# Altium PCB TSAL.PcbDoc
Units mil, origin at the board's own origin, x right, y up, seen from the top; angles counter-clockwise.
Board outline 4803.15 x 2559.06 mil, 2 copper layers (Top Layer, Bottom Layer); 20 components, 14 nets, 60 pads, 4 vias.
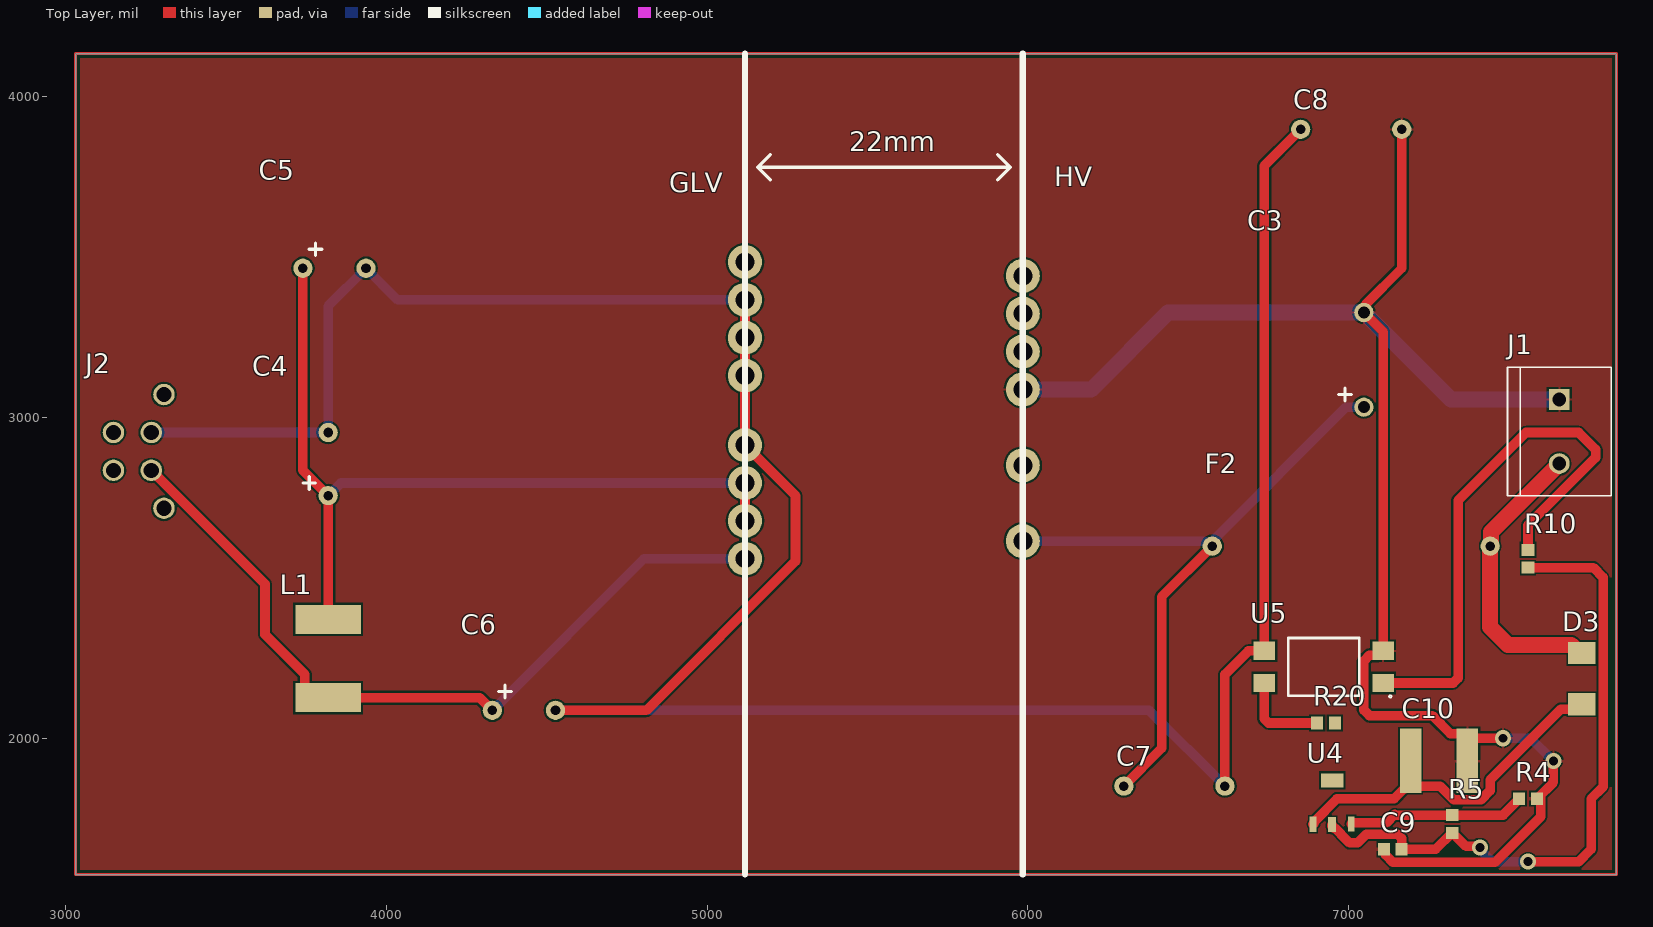
[diagram p0: Top Layer view]
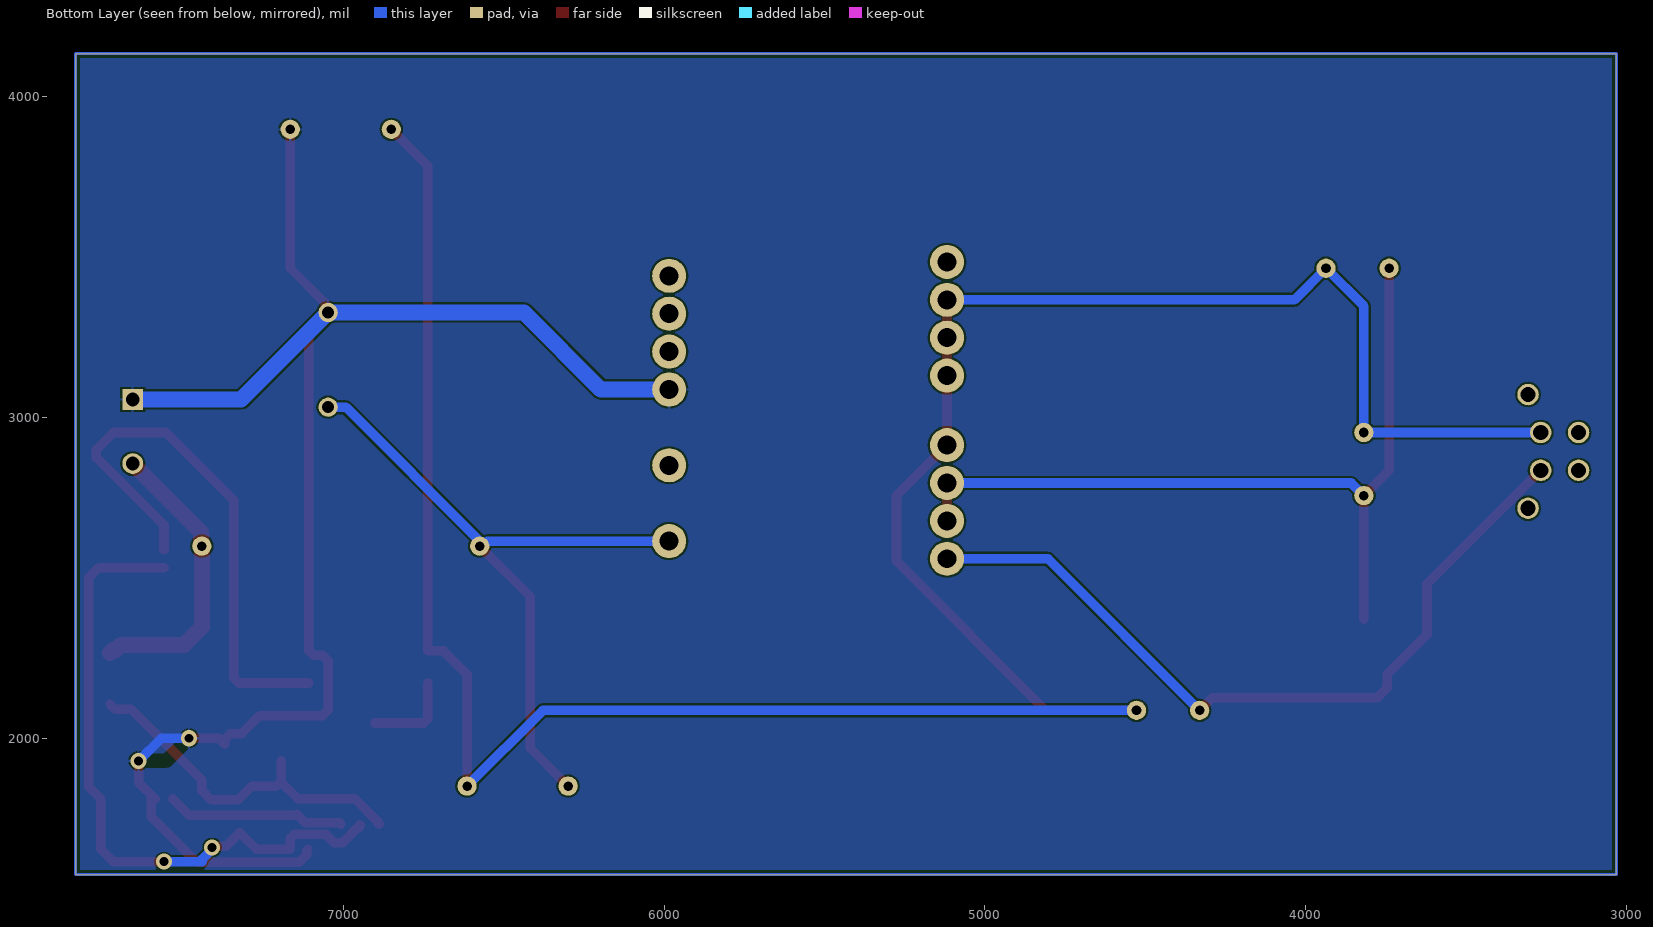
[diagram p1: Bottom Layer view, seen from below]
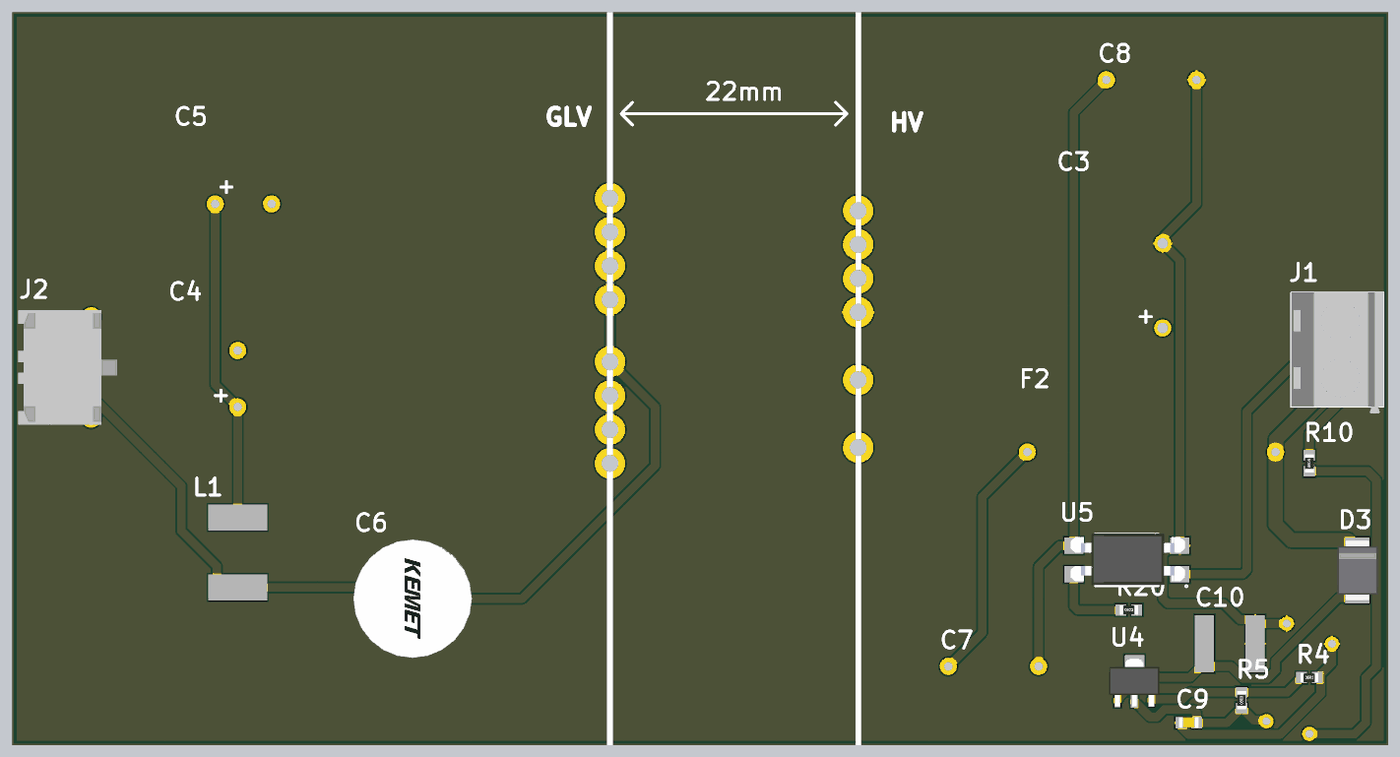
[diagram p2: 3D render of the assembled board from above, using the file's embedded part models]

## Layer stack, top to bottom
Top Solder: solder mask 0.4, Solder Resist, Dk 3.5
Top Layer: signal copper 1.4
Dielectric 1: dielectric 12.6, FR-4, Dk 4.8
Bottom Layer: signal copper 1.4
Bottom Solder: solder mask 0.4, Solder Resist, Dk 3.5

## Board outline
3031.5,1574.8 3031.5,4133.86 7834.65,4133.86 7834.65,1574.8

## Design rules (kind name [scope] priority, off if disabled: settings)
BoardOutlineClearance [All] p1: gap=15 ignorepadtopadclearanceinfootprint=FALSE
Clearance [All] p1: gap=6 ignorepadtopadclearanceinfootprint=FALSE except(0: Arc-Hole Track-Hole SMDPad-Hole THPad-Hole Via-Hole Fill-Hole Poly-Hole Region-Hole Text-Hole)
ComponentClearance [All] p1: gap=1 collisioncheckmode=3 verticalgap=1 showdistances=FALSE
DiffPairsRouting [All] p1: maxlimit=393.7 minlimit=6 mostfreqgap=8 toplayer_minwidth=6 toplayer_maxwidth=15 toplayer_prefwidth=8 bottomlayer_minwidth=6 bottomlayer_maxwidth=15 bottomlayer_prefwidth=8 maxuncoupledlength=500
HoleSize [All] p1: absolutevalues=TRUE maxlimit=265 minlimit=13 maxpercent=80.000 minpercent=20.000
HoleToHoleClearance [All] p1: gap=10 allowstackedmicrovias=FALSE
MinimumAnnularRing [All] p1: minimumring=7
MinimumSolderMaskSliver [All] p1: minsoldermaskwidth=0
PlaneClearance [All] p1: clearance=10
PlaneConnect [All] p1: planeconnectstyle=Direct reliefexpansion=16 reliefentries=4 reliefconductorwidth=6 reliefairgap=6
PolygonConnect [All] p1: connectstyle=Relief reliefconductorwidth=8 reliefentries=4 polygonreliefangle="90 Angle" airgapwidth=6
RoutingCorners [All] p1: cornerstyle=45-Degree minsetback=49.21 maxsetback=49.21
RoutingVias [All] p1: holewidth=15 width=30 viastyle="Through Hole" minholewidth=13 minwidth=27 maxholewidth=100 maxwidth=114
SilkToSilkClearance [All] p1: silktosilkclearance=0
SilkToSolderMaskClearance [IsPad] p1: minsilkscreentomaskgap=6 clearancetoexposedcopper=TRUE
SolderMaskExpansion [All] p1: expansion=2.95 istentingtop=FALSE
Width [All] p1: maxlimit=400 minlimit=6 preferedwidth=8
20 further rules are at their usual default settings.

## Components (designator, comment, footprint, x,y, rotation, side; value= is the part's Value field where it differs from the comment)
C3 "450V, 100uF" 450BXW100MEFR18X30 7047.24,3129.92 r90 top
C4 "25V, 1500µF" 25ZLS1500MEFC12.5X20 3818.9,2834.65 r90 top
C5 "25V, 1500µF" 25ZLS1500MEFC12.5X20 3818.9,3464.57 r0 top
C6 "25V, 820µF" ESY827M025AH5AA 4409.45,2086.61 r0 top
C7 "400V, 330pF" DE2B3SA331KN3AY02F 6555.12,1870.08 r180 top
C8 "400V, 330pF" DE2B3SA331KN3AY02F 6909.45,3877.95 r0 top
C9 "25V 1uF" C0603C105K3RACTU 7137.8,1653.54 r0 top
C10 "450V 1uF" CKG57KX7T2W105K335JH 7283.46,1929.13 r180 top
D3 "SMBJ5363B" 214AA 7716.54,2165.35 r270 top
F2 "0477002.MXEP, 1A, 400V" 0477002.MXEP 7342.52,2598.43 r180 top
J1 "282837-2" 282837-2 7677.17,2952.76 r270 top
J2 "0430450412" 0430450412 3228.35,2913.39 r270 top
L1 "1267AY-2R2N=P3" 1267AY2R2NP3 3818.9,2244.09 r270 top
R4 "18.2K" "Resistor 0603" 7559.06,1811.02 r0 top
R5 "6.04K" "Resistor 0603" 7322.83,1732.28 r90 top
R10 "220" "Resistor 0603" 7559.06,2559.06 r90 top
R20 "120 ohm" "Resistor 0603" 6929.13,2047.24 r0 top
U3 "BPM1234SJ" BPM1234SJ 5748.03,2858.27 r180 top
U4 "LR8N8-G" TO-243AA(SOT-89-3) 6948.87,1728.28 r0 top
U5 "SFH617A" SFH617A 6929.13,2204.72 r180 top

## Footprints (in the part's own frame and the unit in brackets; to place one, negate y for a bottom-side part, rotate by r counter-clockwise, add the part's x,y. Pads: shape width x height; smd on the part's side, far side on the other; paste and mask are expansions set on the pad)
25ZLS1500MEFC12.5X20 [mil]
  round 60 hole 30: 1(118.11,0) 2(-78.74,0)
  silkscreen extent -59,39 -20,79, body extent -226,-246 266,246, height 787
214AA [mil]
  rect 70x85.04 smd: 1(-100,10) 2(60,10)
  body extent -126,-60 86,82, height 91
450BXW100MEFR18X30 [mil]
  round 60 hole 37.4: 1(196.85,0) 2(-98.43,0)
  silkscreen extent -79,39 -39,79, body extent -325,-374 423,374, height 1181
1267AY2R2NP3 [mm]
  rect 2.3x5.2 smd: 1(-3.2,0) 2(3,0)
  body extent -4.25,-4.1 4.05,4.2, height 4
282837-2 [mm] "2 pin connection through hole"
  rect 1.65x1.65 hole 1.1: 1(-2.615,-0.526)
  round 1.65 hole 1.1: 2(2.465,-0.526)
  silkscreen extent -5.15,-4.63 5.01,3.57, body extent -5.18,-4.6 5.58,3.6, height 10.01
0477002.MXEP [mil] "Fuse 2A"
  round 60 hole 30: 1(-98.42,0) 2(767.72,0)
  body extent -89,-197 758,118, height 217
0430450412 [mm]
  round 1.7 hole 1.2: 1(2,-2) 2(-1,-2) 3(2,1) 4(-1,1)
  round 1.7 hole 1.2 unplated: 24(-4,2) 25(5,2)
  body extent -4.57,-4.47 5.58,4.3, height 9.92
BPM1234SJ [mm] "Isolated DC-DC converter 12V"
  round 2.7 hole 1.5: 1(-6,6.2) 2(-6,0.2) 3(-6,-5.8) 4(-6,-8.8) 5(-6,-11.8) 6(-6,-14.8) 7(16,-15.9) 8(16,-12.9) 9(16,-9.9) 10(16,-6.9) 11(16,-1.4) 12(16,1.6) 13(16,4.6) 14(16,7.6)
  body extent -18.05,-20.5 28.45,16, height 23.6
C0603C105K3RACTU [mm]
  rect 0.95x1 smd: 1(-0.7,0) 2(0.7,0)
  body extent -0.87,-0.45 0.87,0.5, height 0.96
CKG57KX7T2W105K335JH [mm]
  rect 1.7x5.1 smd: 1(-2.2,0) 2(2.3,0)
  body extent -3,-2.5 3,2.5, height 3.35
DE2B3SA331KN3AY02F [mil]
  round 60 hole 30: 1(-59.06,19.68) 2(255.91,19.68)
ESY827M025AH5AA [mil]
  round 60 hole 30: 1(118.11,0) 2(-78.74,0)
  silkscreen extent -59,39 -20,79, body extent -187,-207 227,207, height 1064
"Resistor 0603" [mm]
  rect 0.95x1 smd: 1(-0.7,0) 2(0.7,0)
  body extent -0.8,-0.41 0.8,0.41, height 0.45
SFH617A [mm]
  rect 1.7x1.45 smd: 1(-4.521,0.833) 2(-4.521,-1.707) 3(4.879,-1.707) 4(4.879,0.833)
  silkscreen extent -5.19,-2.73 2.98,1.99, body extent -4.98,-2.79 5.18,1.79, height 3.7
TO-243AA(SOT-89-3) [mm]
  rect 0.55x1.2 smd: 1(-1.524,0.076) 3(1.499,0.102)
  rect 0.6x1.2 smd: 2(-0.025,0.051)
  rect 1.75x1.1 smd: 4(0,3.556)
  body extent -2.26,-0.45 2.24,3.8, height 1.55

## Part data
C3: library part 450BXW100MEFR18X30, "Capacitors, Radial, Can, 100µF 450V Aluminum", ComponentLink1Description=Datasheet, ComponentLink1URL=http://www.rubycon.co.jp/en/catalog/e_pdfs/aluminum/e_BXW.pdf, ComponentLink2Description=Supplier, ComponentLink2URL=https://www.digikey.com/product-detail/en/rubycon/450BXW100MEFR18X30/1189-3221-ND/6050094
C4 C5: library part 25ZLS1500MEFC12.5X20, "Capacitors, Aluminum Electrolytic, Radial, Can, 1500µF, 25V", ComponentLink1Description=Datasheet, ComponentLink1URL=http://www.rubycon.co.jp/en/catalog/e_pdfs/aluminum/e_zls.pdf, ComponentLink2Description=Supplier, ComponentLink2URL=https://www.digikey.com/product-detail/en/rubycon/25ZLS1500MEFC12.5X20/1189-2590-ND/4977137
C6: library part ESY827M025AH5AA, "Capacitors Radial, Can, 820µF 25V Aluminum Electrolytic, 23mOhm @ 100kHz 4000 Hrs @ 105°C", ComponentLink1Description=Datasheet, ComponentLink1URL=https://content.kemet.com/datasheets/KEM_A4007_ESY.pdf, ComponentLink2Description=Supplier, ComponentLink2URL=https://www.digikey.com/product-detail/en/kemet/ESY827M025AH5AA/399-6647-ND/3083062
C7 C8: library part DE2B3SA331KN3AY02F, "Capacitor, 330pF ±10% 400VAC Ceramic Capacitor B Radial, Disc"
C9: library part C0603C105K3RACTU, "Capacitor, Ceramic, 1 uF, 25 V, ±10% SMT, 0603", ComponentLink1Description=Datasheet, ComponentLink1URL=https://content.kemet.com/datasheets/KEM_C1002_X7R_SMD.pdf, ComponentLink2Description=Supplier, ComponentLink2URL=https://www.digikey.com/product-detail/en/kemet/C0603C105K3RACTU/399-7376-1-ND/3317410
C10: library part CKG57KX7T2W105K335JH, "Decoupling capacitor", ComponentLink1Description=Datasheet, ComponentLink1URL=https://product.tdk.com/info/en/catalog/datasheets/mlcc_commercial_megacap_en.pdf, ComponentLink2Description=Supplier, ComponentLink2URL=https://www.digikey.com/product-detail/en/tdk-corporation/CKG57KX7T2W105K335JH/445-10489-1-ND/3932416
D3: "Diode Zener 30V 5W ±5% Surface Mount DO-214AA (SMB)"
F2: library part 0477002.MXEP, "Fuse, 2A 500V AC 400V DC Fuse Cartridge, Ceramic Through Hole 5mm x 20mm (Axial)"
J1: "Connector Terminal Blocks Receptacle 2 Position 5.08mm Solder Straight Thru-Hole 13.5A/Contact"
J2: "Connector Header Through Hole 4 position 0.118\" (3.00mm)", ComponentLink1Description=Datasheet, ComponentLink1URL=https://www.molex.com/pdm_docs/sd/430450412_sd.pdf, ComponentLink2Description=Supplier, ComponentLink2URL=https://www.digikey.com/product-detail/en/molex/0430450412/WM1790-ND/252503
L1: "Shielded Wirewound Inductor, 2.2µH ,7.4A 13.2mOhm Max Nonstandard", ComponentLink1Description=Datasheet, ComponentLink1URL=https://www.murata.com/~/media/webrenewal/products/inductor/chip/tokoproducts/wirewoundferritetypeforpl/m_dg8040c.ashx?la=en, ComponentLink2Description=Supplier, ComponentLink2URL=https://www.digikey.com/product-detail/en/murata-electronics/1267AY-2R2N=P3/490-10831-2-ND/5271472
R4: library part ERJ-3EKF1822V, "Resistor, 18.2K ohms, 0603, SMD"
R5: library part ERJ-3EKF6041V, "Resistor, 6.04 kOhms ±1% 0.1W, 1/10W Chip Resistor 0603 (1608 Metric) Automotive AEC-Q200 Thick Film", ComponentLink1Description=Supplier, ComponentLink1URL=https://www.digikey.com/product-detail/en/panasonic-electronic-components/ERJ-3EKF6041V/P6.04KHCT-ND/198452
R10: library part ERJ-3EKF2200V, "Resistor, 220 ohm, 0603"
R20: library part ERJ-3EKF1200V, "Resistor, 120 ohms, 0603, SMD"
U3: "Isolated DC-DC converters, 12 V, 3.4A", ComponentLink1Description=Datasheet, ComponentLink1URL=https://www.mouser.com/datasheet/2/397/BPM1234SJ_1612EE-1272167.pdf, ComponentLink2Description=Supplier, ComponentLink2URL=https://www.mouser.com/ProductDetail/Tamura/BPM1234SJ?qs=JtOM4tvdyp3RA%2FViNUppcg%3D%3D
U4: "Voltage Regulator, Linear, input max 480V, output 1.2V - 440V, TO-243AA , SMD", ComponentLink1Description=Datasheet, ComponentLink1URL=https://www.mouser.com/datasheet/2/268/20005399A-909415.pdf, ComponentLink2Description=Supplier, ComponentLink2URL=https://www.digikey.com/product-detail/en/microchip-technology/LR8N8-G/LR8N8-GCT-ND/4918747
U5: "opto-Isolator", ComponentLink1Description=Datasheet, ComponentLink1URL=http://www.vishay.com/docs/83740/sfh617a.pdf, ComponentLink2Description=Supplier, ComponentLink2URL=https://www.digikey.com/product-detail/en/vishay-semiconductor-opto-division/SFH617A-2X017T/SFH617A-2X017TCT-ND/8556837

## Via types
v1: diameter 50, hole 28, Top Layer to Bottom Layer, 4 vias

## Nets (pads, with @x,y where several pads share a name; then routed paths per layer and width w, separated by ;. In a path a pad name is that pad's centre, name@x,y a point inside that pad or via, vN(x,y) a via of type N, cw(c..) or ccw(c..) an arc to the next point about the centre after c; other vN are vias at no path point)
12V+: C6.2 J2.3 L1.2 U3.14 | length 2473
  Top Layer w30: J2.3 3622.05,2480.31 3622.05,2322.83 3746.2,2198.69 3746.2,2156.26 3776.47,2125.98 4291.34,2125.98 C6.2
  Bottom Layer w30: C6.2 4803.15,2559.06 U3.14
12V-: C4.1 C5.1 C6.1 C7.1 C8.1 J2.4 U3.8 U3.9 U3.10 U3.11 U5.3 | length 8512.8
  Top Layer w30: C6.1 4810.61,2086.61 5275.59,2551.59 5275.59,2755.91 U3.11 U3.10 U3.9 U3.8 ; C7.1 6614.17,2198.6 6687.5,2271.93 U5.3 6737.05,3784.29 C8.1
  Bottom Layer w30: J2.4 C4.1 3818.9,3346.46 C5.1 4035.43,3366.14 U3.8 ; C6.1 6377.95,2086.61 C7.1
555out: J2.2
HV+: D3.1 F2.1 J1.2 | length 917.8
  Top Layer w50: J1.2 7442.86,2642.11 7442.86,2600.34 F2.1 7440.94,2346.32 7496.32,2290.94 7693.43,2290.94 7709.02,2275.35 7716.54,2275.35 D3.1
HV-: C3.1 C8.2 C9.1 C10.1 J1.1 R4.2 U3.3 U5.2 | length 5261.8
  Top Layer w30: C9.1 7113.94,1649.84 7113.94,1636.88 7137.95,1612.86 7456.53,1612.86 7598.43,1754.75 R4.2@7598.43,1816.66 ; C8.2 7165.35,3464.57 7052.98,3352.2 7052.98,3332.51 C3.1 7107.13,3266.89 U5.2 7093.58,2258.39 7064.82,2258.39 7047.24,2240.81 7047.24,2087.57 7064.82,2070 7260.71,2070 7317.08,2013.63 7351.61,2013.63 7370.08,1995.17 7370.08,1981.1 7388.54,1999.57 v1(7480.31,1999.57) ; R4.2 7637.8,1862.2 v1(7637.8,1929.13)
  Bottom Layer w30: v1(7480.31,1999.57) 7567.36,1999.57 v1(7637.8,1929.13)
  Bottom Layer w50: U3.3 6196.85,3086.61 6437.01,3326.77 C3.1 7318.31,3055.71 J1.1
LED-: R20.2
LedON: J2.1
NetC3_2: C3.2 C7.2 F2.2 U3.1 | length 2104.6
  Top Layer w30: C7.2 6417.32,1968.5 6417.32,2440.94 F2.2
  Bottom Layer w30: U3.1 6550.94,2614.17 6566.69,2598.43 F2.2 ; F2.2@6574.8,2614.17 6992.13,3031.5 C3.2
NetC4_2: C4.2 C5.2 L1.1 U3.12 U3.13 | length 2560.7
  Top Layer w30: C5.2 3740.16,2834.65 C4.2 L1.1 ; U3.13 U3.12
  Bottom Layer w30: C4.2 3858.27,2795.28 U3.12
NetC9_2: C9.2 R5.1 R10.1 U4.2 | length 2077.6
  Top Layer w30: U4.2 6947.87,1724.85 6954.25,1718.47 6958.47,1718.47 6976.05,1700.9 6976.05,1699.96 7002.74,1673.27 7027.6,1673.27 7054.33,1700 7152.85,1700 7165.35,1687.5 C9.2 7270.67,1653.54 7321.85,1704.72 R5.1 7323.82,1704.72 7365.86,1662.69 7405.29,1662.69 v1(7409.12,1658.86) ; v1(7559.06,1614.8) 7559.68,1614.17 7716.54,1614.17 7755.91,1653.54 7755.91,1811.02 7793.06,1848.18 7793.06,2500.94 7762.5,2531.5 R10.1
  Bottom Layer w30: v1(7409.12,1658.86) 7409.12,1653.45 7440.32,1622.25 7440.32,1614.8 v1(7559.06,1614.8)
NetC10_2: C10.2 D3.2 U4.1 | length 1128.9
  Top Layer w30: U4.1 6893.05,1735.46 6893.05,1740.59 6963.48,1811.02 7141.73,1811.02 7192.91,1862.2 C10.2@7192.91,1866 ; C10.2 C10.2@7192.91,1866 ; D3.2 7711.05,2089.87 7660.87,2089.87 7440.94,1869.94 7440.94,1836.44 7412.24,1807.74 7327.91,1807.74 7285.26,1850.39 7208.52,1850.39 C10.2@7192.91,1866
NetR4_1: R4.1 R5.2 U4.3 | length 558.6
  Top Layer w30: U4.3 7011.59,1736 7117.62,1736 7143.59,1761.97 7145.72,1759.84 R5.2 7481.3,1759.84 7531.5,1810.04 R4.1
NetR10_2: R10.2 U5.1 | length 1732.5
  Top Layer w30: U5.1 7325.43,2171.93 7341,2187.5 7341,2741 7552.76,2952.76 7716.54,2952.76 7769.75,2899.54 7769.75,2874.69 7559.06,2664 R10.2
NetR20_1: R20.1 U5.4 | length 281.6
  Top Layer w30: U5.4 6737.05,2060.2 6750,2047.24 R20.1
pads on no net: J2.24 J2.25 U3.2 U3.4 U3.5 U3.6 U3.7 U4.4
copper on no net: | length 29448.8
  Top Layer w10: 3031.5,1574.8 3031.5,4133.86 7834.65,4133.86 7834.65,1574.8 3031.5,1574.8
  Bottom Layer w10: 3031.5,1574.8 7834.65,1574.8 7834.65,4133.86 3031.5,4133.86 3031.5,1574.8

## Polygon pours and split planes (outlines as drawn)
HV- on Top Layer "HV-_L01_P000" (solid, pour order 0): 3031.5,1574.8 7834.65,1574.8 7834.65,4133.86 3031.5,4133.86
HV- on Bottom Layer "HV-_L02_P001" (solid, pour order 1): 3031.5,1574.8 3031.5,4133.86 7834.65,4133.86 7834.65,1574.8

## Silkscreen, mask and mechanical layers (free items; w line width, h text height)
Top Overlay:
  lines w10: 5196.85,3740.16 5157.48,3779.53 ; 5196.85,3818.9 5157.48,3779.53 ; 5905.51,3740.16 5944.88,3779.53 ; 5905.51,3818.9 5944.88,3779.53 ; 5157.48,3779.53 5275.59,3779.53 5905.51,3779.53 5944.88,3779.53
  lines w19.68: 5118.11,1574.8 5118.11,4133.86 ; 5984.25,1574.8 5984.25,4133.86
  text "22mm" at 5443.07,3828.9 h60
  text "HV" at 6082.68,3720.47 h60
  text "GLV" at 4881.89,3700.79 h60